# EAGLE board kegboard (EAGLE 5.08)

Size 101.6 x 66.04 mm. Coordinates in mm from the lower left corner, seen from the top.
Outline: 0,0 101.6,0 101.6,66.04 0,66.04 0,0
Copper layers (1*16): Top 0.035mm / dielectric 1.5mm / Bottom 0.035mm
Design rules "default": minimum track width 10mil, minimum drill 24mil, track to track 8mil, track to pad 8mil, pad to pad 8mil, via to via 8mil, smd to smd 8mil, copper to edge 40mil, drill to drill 8mil, minimum pad ring 10mil, minimum via ring 8mil, stop-mask expansion 4mil, vias tented up to drill 0mil, thermal gap 10mil

## Footprints (pad centres in the part's own frame; a part is rotated, then mirrored left to right if it is on the bottom)
CAP-PTH-SMALL2 = drill 0.7 pad 1.651 round: 1 0,0; 2 2.54,0
DIODE-1N4148 = drill 0.9 pad 1.88 round: A -3.81,0; C 3.81,0
RJ11-6 = drill 0.889 round: 1 1.905,8.89; 2 3.175,6.35; 3 4.445,8.89; 4 5.715,6.35; 5 6.985,8.89; 6 8.255,6.35 | hole 3.251: 0,0; 10.16,0
SCREWTERMINAL-3.5MM-6 = drill 1.2 pad 2.032 square: 1 0,0 | drill 1.2 pad 2.032 round: 2 3.5,0; 3 7,0; 4 10.5,0; 5 14,0; 6 17.5,0
SCREWTERMINAL-3.5MM-8 = drill 1.2 pad 2.032 square: 1 0,0 | drill 1.2 pad 2.032 round: 2 3.5,0; 3 7,0; 4 10.5,0; 5 14,0; 6 17.5,0; 7 21,0; 8 24.5,0
LED3MM = drill 0.813 octagon: A -1.27,0; K 1.27,0
TO-92 = drill 0.813 pad 1.88 round: 1 -1.27,0; 2 0,1.905; 3 1.27,0
AXIAL-0.3 = drill 0.9 pad 1.88 round: P$1 -3.81,0; P$2 3.81,0
RELAY-G5V = drill 1.016 round: 1 5.08,2.54; 2 2.54,2.54; 5 -5.08,2.54; 6 -5.08,-2.54; 9 2.54,-2.54; 10 5.08,-2.54
TACTILE-PTH = drill 1.016 round: 1 -3.251,2.261; 2 3.251,2.261; 3 -3.251,-2.261; 4 3.251,-2.261
BUZZER-12MM = drill 0.9 round: + 3.25,0; - -3.25,0
TO-92' = drill 0.813 octagon: 1 1.27,0; 2 0,1.905; 3 -1.27,0
RJ45-8 = drill 1 pad 1.88 square: 1 -4.445,6.35 | drill 1 pad 1.88 round: 2 -3.175,8.89; 3 -1.905,6.35; 4 -0.635,8.89; 5 0.635,6.35; 6 1.905,8.89; 7 3.175,6.35; 8 4.445,8.89 | hole 3.2: -5.715,0; 5.715,0
XBEE-1 = drill 0.8 pad 1.524 round: 1 -11,20; 2 -11,18; 3 -11,16; 4 -11,14; 5 -11,12; 6 -11,10; 7 -11,8; 8 -11,6; 9 -11,4; 10 -11,2; 11 11,2; 12 11,4; 13 11,6; 14 11,8; 15 11,10; 16 11,12; 17 11,14; 18 11,16; 19 11,18; 20 11,20
ARDUINO-MEGA = drill 0.8 square: 3.3V 35.56,2.54; 5V 38.1,2.54; A0 50.8,2.54; A1 53.34,2.54; A2 55.88,2.54; A3 58.42,2.54; A4 60.96,2.54; A5 63.5,2.54; A6 66.04,2.54; A7 68.58,2.54; A8 73.66,2.54; A9 76.2,2.54; A10 78.74,2.54; A11 81.28,2.54; A12 83.82,2.54; A13 86.36,2.54; A14 88.9,2.54; A15 91.44,2.54; AREF 24.13,50.8; D2 58.42,50.8; D3 55.88,50.8; D4 53.34,50.8; D5 50.8,50.8; D6 48.26,50.8; D7 45.72,50.8; D8 41.91,50.8; D9 39.37,50.8; D10 36.83,50.8; D11 34.29,50.8; D12 31.75,50.8; D13 29.21,50.8; D14 68.58,50.8; D15 71.12,50.8; D16 73.66,50.8; D17 76.2,50.8; D18 78.74,50.8; D19 81.28,50.8; D22 93.98,48.26; D23 96.52,48.26; D24 93.98,45.72; D25 96.52,45.72; D26 93.98,43.18; D27 96.52,43.18; D28 93.98,40.64; D29 96.52,40.64; D30 93.98,38.1; D31 96.52,38.1; D32 93.98,35.56; D33 96.52,35.56; D34 93.98,33.02; D35 96.52,33.02; D36 93.98,30.48; D37 96.52,30.48; D38 93.98,27.94; D39 96.52,27.94; D40 93.98,25.4; D41 96.52,25.4; D42 93.98,22.86; D43 96.52,22.86; D44 93.98,20.32; D45 96.52,20.32; D46 93.98,17.78; D47 96.52,17.78; D48 93.98,15.24; D49 96.52,15.24; D50 93.98,12.7; D51 96.52,12.7; D52 93.98,10.16; D53 96.52,10.16; GND 40.64,2.54; GND2 43.18,2.54; GND3 26.67,50.8; RES 33.02,2.54; RXO 63.5,50.8; SCL 86.36,50.8; SDA 83.82,50.8; TXI 60.96,50.8; VIN 45.72,2.54

## Placement (x,y rotation side)
C1  0.1uF  [CAP-PTH-SMALL2]  8.89,2.54 90 top
D1  [DIODE-1N4148]  78.74,17.78 270 top
D2  [DIODE-1N4148]  78.74,27.94 270 top
D3  [DIODE-1N4148]  78.74,38.1 270 top
D4  [DIODE-1N4148]  78.74,48.26 270 top
J1  RJ11-6PTH  [RJ11-6]  82.55,2.54 0 top
JP1  [SCREWTERMINAL-3.5MM-6]  99.06,2.54 90 top
JP3  [SCREWTERMINAL-3.5MM-6]  2.54,21.59 270 top
JP6  [SCREWTERMINAL-3.5MM-6]  2.54,45.72 270 top
JP7  [SCREWTERMINAL-3.5MM-8]  99.06,25.4 90 top
LED1  [LED3MM]  10.16,44.45 180 top
LED_RELAY_A  [LED3MM]  50.8,8.89 180 top
LED_RELAY_B  [LED3MM]  50.8,17.78 180 top
LED_RELAY_C  [LED3MM]  50.8,26.67 180 top
LED_RELAY_D  [LED3MM]  50.8,35.56 180 top
Q1  [TO-92]  66.04,12.7 270 top
Q2  [TO-92]  66.04,21.59 270 top
Q3  [TO-92]  66.04,30.48 270 top
Q4  [TO-92]  66.04,39.37 270 top
R5  1k  [AXIAL-0.3]  26.67,41.91 270 top
R9  10k  [AXIAL-0.3]  58.42,11.43 180 top
R10  1k  [AXIAL-0.3]  58.42,13.97 0 top
R11  1k  [AXIAL-0.3]  58.42,8.89 0 top
R12  10k  [AXIAL-0.3]  58.42,20.32 180 top
R13  1k  [AXIAL-0.3]  58.42,22.86 0 top
R14  1k  [AXIAL-0.3]  58.42,17.78 0 top
R15  10k  [AXIAL-0.3]  58.42,29.21 180 top
R16  1k  [AXIAL-0.3]  58.42,31.75 0 top
R17  1k  [AXIAL-0.3]  58.42,26.67 0 top
R18  10k  [AXIAL-0.3]  58.42,38.1 180 top
R19  1k  [AXIAL-0.3]  58.42,40.64 0 top
R20  1k  [AXIAL-0.3]  58.42,35.56 0 top
R_FLOW_A  1k  [AXIAL-0.3]  36.83,41.91 90 top
R_FLOW_B  1k  [AXIAL-0.3]  34.29,41.91 90 top
R_FLOW_C  1k  [AXIAL-0.3]  58.42,44.45 0 top
R_FLOW_D  1k  [AXIAL-0.3]  58.42,46.99 0 top
R_FLOW_E  1k  [AXIAL-0.3]  48.26,46.99 0 top
R_FLOW_F  1k  [AXIAL-0.3]  48.26,44.45 180 top
R_ONEWIRE_A  4.7k  [AXIAL-0.3]  24.13,41.91 90 top
R_ONEWIRE_B  4.7k  [AXIAL-0.3]  20.32,41.91 90 top
R_ONEWIRE_C  4.7k  [AXIAL-0.3]  29.21,41.91 90 top
R_ONEWIRE_D  4.7k  [AXIAL-0.3]  31.75,41.91 90 top
R_ONEWIRE_E  4.7k  [AXIAL-0.3]  15.24,41.91 90 top
R_ONEWIRE_F  4.7k  [AXIAL-0.3]  44.45,10.16 270 top
R_ONEWIRE_G  4.7k  [AXIAL-0.3]  46.99,10.16 270 top
RELAY_A  RELAY-2G5Q  [RELAY-G5V]  87.63,17.78 180 top
RELAY_B  RELAY-2G5Q  [RELAY-G5V]  87.63,27.94 180 top
RELAY_C  RELAY-2G5Q  [RELAY-G5V]  87.63,38.1 180 top
RELAY_D  RELAY-2G5Q  [RELAY-G5V]  87.63,48.26 180 top
S1  [TACTILE-PTH]  76.2,5.08 0 top
SG1  BUZZERPTH  [BUZZER-12MM]  40.64,26.67 90 top
U2  [TO-92']  38.1,17.78 180 top
U$1  RJ45-8PTH  [RJ45-8]  76.2,63.5 180 top
U$2  XBEE-1B1  [XBEE-1]  20.32,15.24 0 top
U$3  RJ45-8PTH  [RJ45-8]  92.71,63.5 180 top
U$4  RJ45-8PTH  [RJ45-8]  59.69,63.5 180 top
U$5  RJ45-8PTH  [RJ45-8]  43.18,63.5 180 top
U$6  ARDUINO-MEGA  [ARDUINO-MEGA]  -21.59,0 0 top
U$7  RJ45-8PTH  [RJ45-8]  26.67,63.5 180 top
U$8  RJ45-8PTH  [RJ45-8]  10.16,63.5 180 top

## Library data of the parts
C1 D1-D4 J1 Q1-Q4 R5 R9-R20 R_FLOW_A R_FLOW_B R_FLOW_C R_FLOW_D R_FLOW_E R_FLOW_F R_ONEWIRE_A R_ONEWIRE_B R_ONEWIRE_C R_ONEWIRE_D R_ONEWIRE_E R_ONEWIRE_F R_ONEWIRE_G RELAY_A RELAY_B RELAY_C RELAY_D S1 SG1 U$1-U$5 U$7 U$8 = SparkFun
JP1 JP3 JP6 JP7 = SparkFun-20100412
LED1 LED_RELAY_A LED_RELAY_B LED_RELAY_C LED_RELAY_D = led
U2 = merriman
U$6 = arduino-mega

## Nets
+3V3: U$6.3.3V
ALARM: U$6.D9
BUZZER: SG1.+ U$6.D11
FLOW_A: R_FLOW_A.P$2 U$1.3 U$6.D2 U$8.4
FLOW_B: R_FLOW_B.P$2 U$1.4 U$3.3 U$6.D3
FLOW_C: R_FLOW_C.P$2 U$3.4 U$4.3 U$6.SCL
FLOW_D: R_FLOW_D.P$2 U$4.4 U$5.3 U$6.SDA
FLOW_E: R_FLOW_E.P$2 U$5.4 U$6.D19 U$7.3
FLOW_F: R_FLOW_F.P$2 U$6.D18 U$7.4 U$8.3
GND: C1.2 J1.2 J1.4 JP1.3 JP1.6 JP3.3 JP3.6 JP6.3 JP6.6 LED1.K Q1.1 Q2.1 Q3.1 Q4.1 R9.P$2 R12.P$2 R15.P$2 R18.P$2 S1.1 S1.2 SG1.- U2.3 U$1.2 U$1.6 U$1.8 U$2.10 U$3.2 U$3.6 U$3.8 U$4.2 U$4.6 U$4.8 U$5.2 U$5.6 U$5.8 U$6.GND U$6.GND2 U$6.GND3 U$6.VIN U$7.2 U$7.6 U$7.8 U$8.2 U$8.6 U$8.8
GPO_A: JP1.2 U$6.A4
GPO_B: JP1.5 U$6.A5
GPO_C: JP6.2 U$6.D17
GPO_D: JP6.5 U$6.D16
GPO_E: JP3.2 U$6.D15
GPO_F: JP3.5
LED_A: R5.P$1 U$6.D6
N$1: LED1.A R5.P$2
N$7: D1.A Q1.3 R11.P$2 RELAY_A.9
N$8: Q1.2 R9.P$1 R10.P$2
N$10: LED_RELAY_A.K R11.P$1
N$12: D2.A Q2.3 R14.P$2 RELAY_B.9
N$13: Q2.2 R12.P$1 R13.P$2
N$14: LED_RELAY_B.K R14.P$1
N$17: D3.A Q3.3 R17.P$2 RELAY_C.9
N$18: Q3.2 R15.P$1 R16.P$2
N$19: LED_RELAY_C.K R17.P$1
N$22: D4.A Q4.3 R20.P$2 RELAY_D.9
N$23: Q4.2 R18.P$1 R19.P$2
N$24: LED_RELAY_D.K R20.P$1
N$25: R_ONEWIRE_A.P$1 R_ONEWIRE_B.P$1 R_ONEWIRE_C.P$1 R_ONEWIRE_D.P$1 R_ONEWIRE_E.P$1 R_ONEWIRE_F.P$1 R_ONEWIRE_G.P$1
N$27: U$6.D14
N$29: U$6.D13
N$31: U$6.AREF
N$37: U$6.RES
ONEWIRE_A: J1.3 R_ONEWIRE_A.P$2 U$6.D7
ONEWIRE_B: R_ONEWIRE_B.P$2 U2.2 U$1.7 U$6.D8
ONEWIRE_C: R_ONEWIRE_C.P$2 U$3.7 U$6.D5
ONEWIRE_D: R_ONEWIRE_D.P$2 U$4.7 U$6.D4
ONEWIRE_E: R_ONEWIRE_E.P$2 U$5.7 U$6.D10 U$7.7 U$8.7
ONEWIRE_F: R_ONEWIRE_F.P$2 U$6.A6
ONEWIRE_G: R_ONEWIRE_G.P$2 U$6.A7
RAO_1: JP7.1 RELAY_A.6
RAO_2: JP7.2 RELAY_A.10
RBO_1: JP7.3 RELAY_B.6
RBO_2: JP7.4 RELAY_B.10
RCO_1: JP7.5 RELAY_C.6
RCO_2: JP7.6 RELAY_C.10
RDO_1: JP7.7 RELAY_D.6
RDO_2: JP7.8 RELAY_D.10
RELAY_A: R10.P$1 U$6.A0
RELAY_B: R13.P$1 U$6.A1
RELAY_C: R16.P$1 U$6.A2
RELAY_D: R19.P$1 U$6.A3
RESET: S1.3 S1.4
RXI: U$2.2 U$6.RXO
TEST_PULSE: U$6.D12
TXO: U$2.3 U$6.TXI
VCC: C1.1 D1.C D2.C D3.C D4.C J1.1 JP1.1 JP1.4 JP3.1 JP3.4 JP6.1 JP6.4 LED_RELAY_A.A LED_RELAY_B.A LED_RELAY_C.A LED_RELAY_D.A R_FLOW_A.P$1 R_FLOW_B.P$1 R_FLOW_C.P$1 R_FLOW_D.P$1 R_FLOW_E.P$1 R_FLOW_F.P$1 RELAY_A.2 RELAY_B.2 RELAY_C.2 RELAY_D.2 U2.1 U$1.1 U$1.5 U$2.1 U$3.1 U$3.5 U$4.1 U$4.5 U$5.1 U$5.5 U$6.5V U$7.1 U$7.5 U$8.1 U$8.5

## Tracks (layer width: path | path; a pad name or v marks a point on that pad's centre or on a via)
BUZZER  (1 unrouted)
FLOW_A  (3 unrouted)
FLOW_B  (3 unrouted)
FLOW_C  (3 unrouted)
FLOW_D  (3 unrouted)
FLOW_E  (3 unrouted)
FLOW_F  (3 unrouted)
GND  (44 unrouted)
GPO_A  (1 unrouted)
GPO_B  (1 unrouted)
GPO_C  (1 unrouted)
GPO_D  (1 unrouted)
GPO_E  (1 unrouted)
LED_A  (1 unrouted)
N$1  (1 unrouted)
N$7  (3 unrouted)
N$8  (2 unrouted)
N$10  (1 unrouted)
N$12  (3 unrouted)
N$13  (2 unrouted)
N$14  (1 unrouted)
N$17  (3 unrouted)
N$18  (2 unrouted)
N$19  (1 unrouted)
N$22  (3 unrouted)
N$23  (2 unrouted)
N$24  (1 unrouted)
N$25  (6 unrouted)
ONEWIRE_A  (2 unrouted)
ONEWIRE_B  (3 unrouted)
ONEWIRE_C  (2 unrouted)
ONEWIRE_D  (2 unrouted)
ONEWIRE_E  (4 unrouted)
ONEWIRE_F  (1 unrouted)
ONEWIRE_G  (1 unrouted)
RAO_1  (1 unrouted)
RAO_2  (1 unrouted)
RBO_1  (1 unrouted)
RBO_2  (1 unrouted)
RCO_1  (1 unrouted)
RCO_2  (1 unrouted)
RDO_1  (1 unrouted)
RDO_2  (1 unrouted)
RELAY_A  (1 unrouted)
RELAY_B  (1 unrouted)
RELAY_C  (1 unrouted)
RELAY_D  (1 unrouted)
RESET  (1 unrouted)
RXI  (1 unrouted)
TXO  (1 unrouted)
VCC  (40 unrouted)